# Altium PCB WPT Round 2 RX Layout.PcbDoc (part 2 of 2)
Units mm, origin at the board's own origin, x right, y up, seen from the top; angles counter-clockwise.
Board outline 85 x 80 mm, 4 copper layers (Top Layer, Ground 1, Ground 2, Bottom Layer), stack 0.603 mm thick; 127 components, 46 nets, 302 pads, 216 vias.
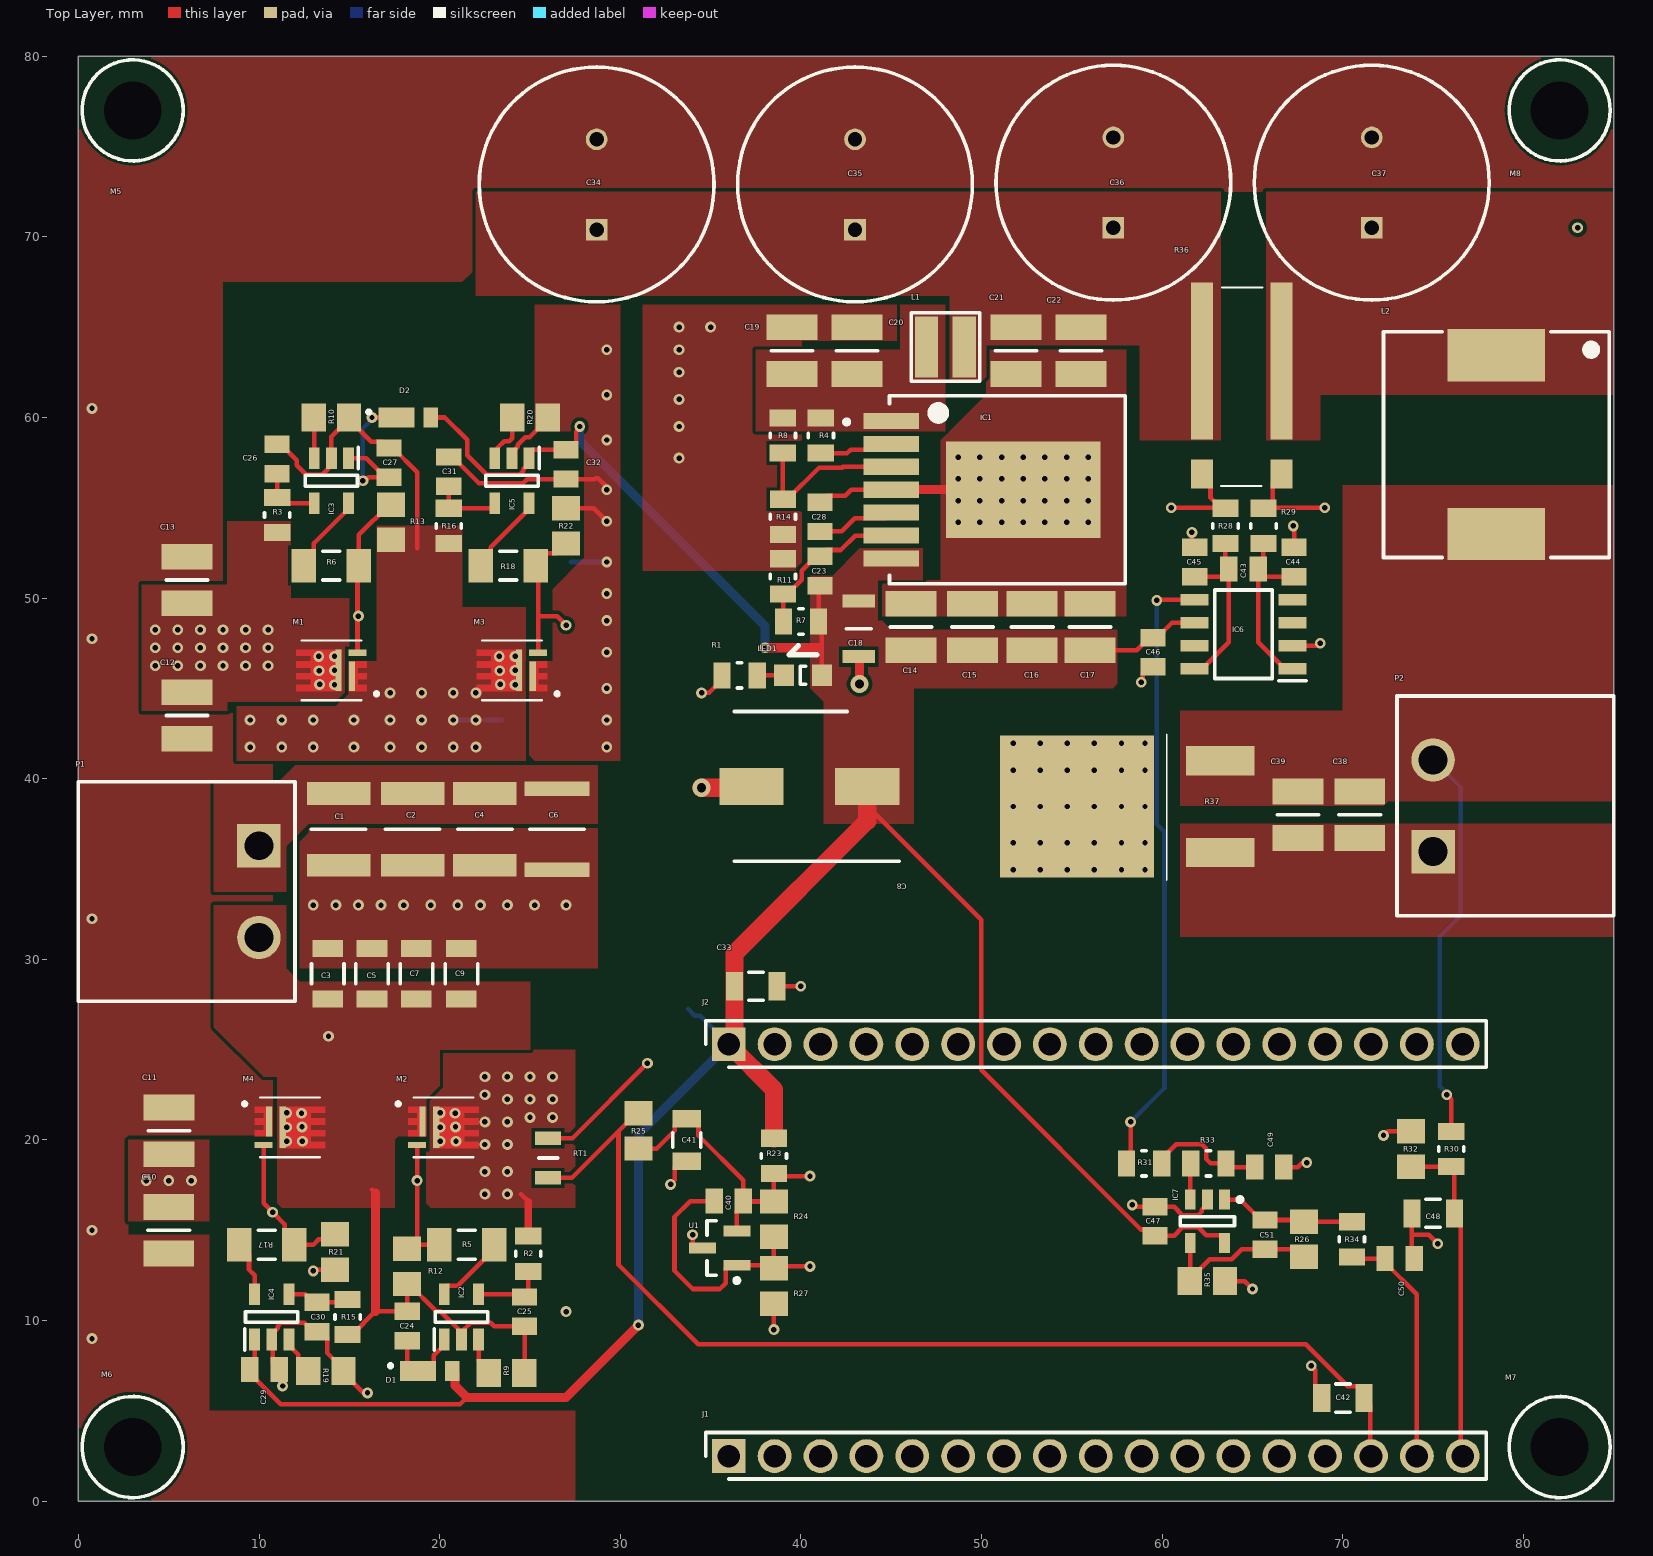
[diagram p0: Top Layer view]

## Polygon pours and split planes (outlines as drawn) (continued)
GND on Ground 2 (split plane): 84.49,31.352 61.102,31.352 61.102,43.648 70,43.648 70.039,43.656 70.072,43.678 70.094,43.711 70.102,43.75 70.102,58.5 70.094,58.539 70.072,58.572 69.822,58.822 69.789,58.844 69.75,58.852 58.852,58.852 58.852,66.648 63.25,66.648 63.289,66.656 63.322,66.678 63.344,66.711 63.352,66.75 63.352,72.5 63.344,72.539 63.322,72.572 63.289,72.594 63.25,72.602 2.75,72.602 2.711,72.594 2.678,72.572 2.656,72.539 2.648,72.5 2.648,15.5 2.656,15.461 2.678,15.428 2.711,15.406 2.75,15.398 15.422,15.398 15.428,15.389 15.461,15.367 15.5,15.359 28.629,15.359 28.629,0.51 0.51,0.51 0.51,79.49 84.49,79.49
P+ on Ground 2 (split plane): 63.148,66.852 30,66.852 29.961,66.844 29.928,66.822 29.906,66.789 29.898,66.75 29.898,30.078 29.889,30.072 29.867,30.039 29.86,30.004 28.705,28.85 28.694,28.833 28.678,28.822 28.656,28.789 28.648,28.75 28.648,15.563 15.578,15.563 15.572,15.572 15.539,15.594 15.5,15.602 2.852,15.602 2.852,72.398 63.148,72.398
GND on Ground 2 (split plane): 58.648,58.75 58.656,58.711 58.678,58.678 58.711,58.656 58.75,58.648 69.708,58.648 69.898,58.458 69.898,43.852 61,43.852 60.961,43.844 60.928,43.822 60.906,43.789 60.898,43.75 60.898,31.25 60.906,31.211 60.928,31.178 60.961,31.156 61,31.148 84.49,31.148 84.49,0.51 28.833,0.51 28.833,15.444 28.844,15.461 28.852,15.5 28.852,28.708 30.033,29.889 30.049,29.912 30.072,29.928 30.094,29.961 30.102,30 30.102,66.648 58.648,66.648
"Rectifier Vin 2" on Ground 2 (split plane): 15.398,43.458 15.398,37.5 15.406,37.461 15.428,37.428 15.678,37.178 15.711,37.156 15.75,37.148 28.648,37.148 28.648,29.602 7.746,29.602 7.822,29.678 7.844,29.711 7.852,29.75 7.852,44.148 14.708,44.148

## Other copper
Bottom Layer:
  pour cut-out: 30,66.5 65.75,66.5 65.75,58.75 70,58.75 70,31.25 85,31.25 85,31 69.75,31 69.75,58.5 65.5,58.5 65.5,66.25 30,66.25
Ground 1 (plane layer: these items are gaps in the copper):
  lines w0.2: 3.5,48.711 3.515,48.696 3.515,45.765 11.015,45.765 11.015,48.786 ; 3.5,48.75 11,48.75 6.5,48.75 ; 58.75,58.127 58.75,61.5 ; 62.5,37.5 61,37.5 61,31.25 85,31.25 85,0 30,0 30,1.25 30,13.75 30,28.75 31.25,30 31.25,66.25 58.75,66.25 58.75,58.25 58.873,58.127 69.873,58.127 70,58 70,43.75 61,43.75 61,39.25 61.75,39.25 62.5,39.25 ; 19.5,16.25 19.5,25 27.5,25 27.5,16.25 19.5,16.25
Ground 2 (plane layer: these items are gaps in the copper):
  lines w0.2: 15.5,15.461 28.711,15.461 28.75,15.5 28.75,28.75 ; 15.5,15.5 2.75,15.5 2.75,72.5 63.25,72.5 63.25,66.75 30,66.75 30,30 ; 28.731,0.019 28.731,15.481 ; 28.777,28.777 29.961,29.961 29.961,30 ; 58.75,66.75 58.75,58.75 69.75,58.75 70,58.5 70,43.75 61,43.75 61,31.25 85,31.25 ; 7.5,29.5 7.75,29.75 7.75,44.25 8.75,44.25 14.75,44.25 15.5,43.5 15.5,37.5 15.75,37.25 21,37.25 28.75,37.25 28.75,29.5 7.5,29.5

## Silkscreen, mask and mechanical layers (free items; w line width, h text height)
Bottom Overlay:
  text "+ve" at 77.45,39.7 h0.8 r270
  text "GND" at 77.45,34.7 h0.8 r270
  text "Power Output" at 82.217,33.95 h0.8 r270
  text "WPT To Coil" at 5.95,29.7 h0.8 r270
  text "WPT Round 2 RX" at 27.05,3.7 h0.8
  text "AE" at 23.3,1.45 h0.8
Board Outline:
  the board outline again, w0.2